# Altium PCB f429ig.pcbdoc (part 2 of 3)
Units mil, origin at the board's own origin, x right, y up, seen from the top; angles counter-clockwise.
Board outline 8198.65 x 7801.59 mil, 2 copper layers (Top Layer, Bottom Layer); 96 components, 183 nets, 663 pads, 462 vias.
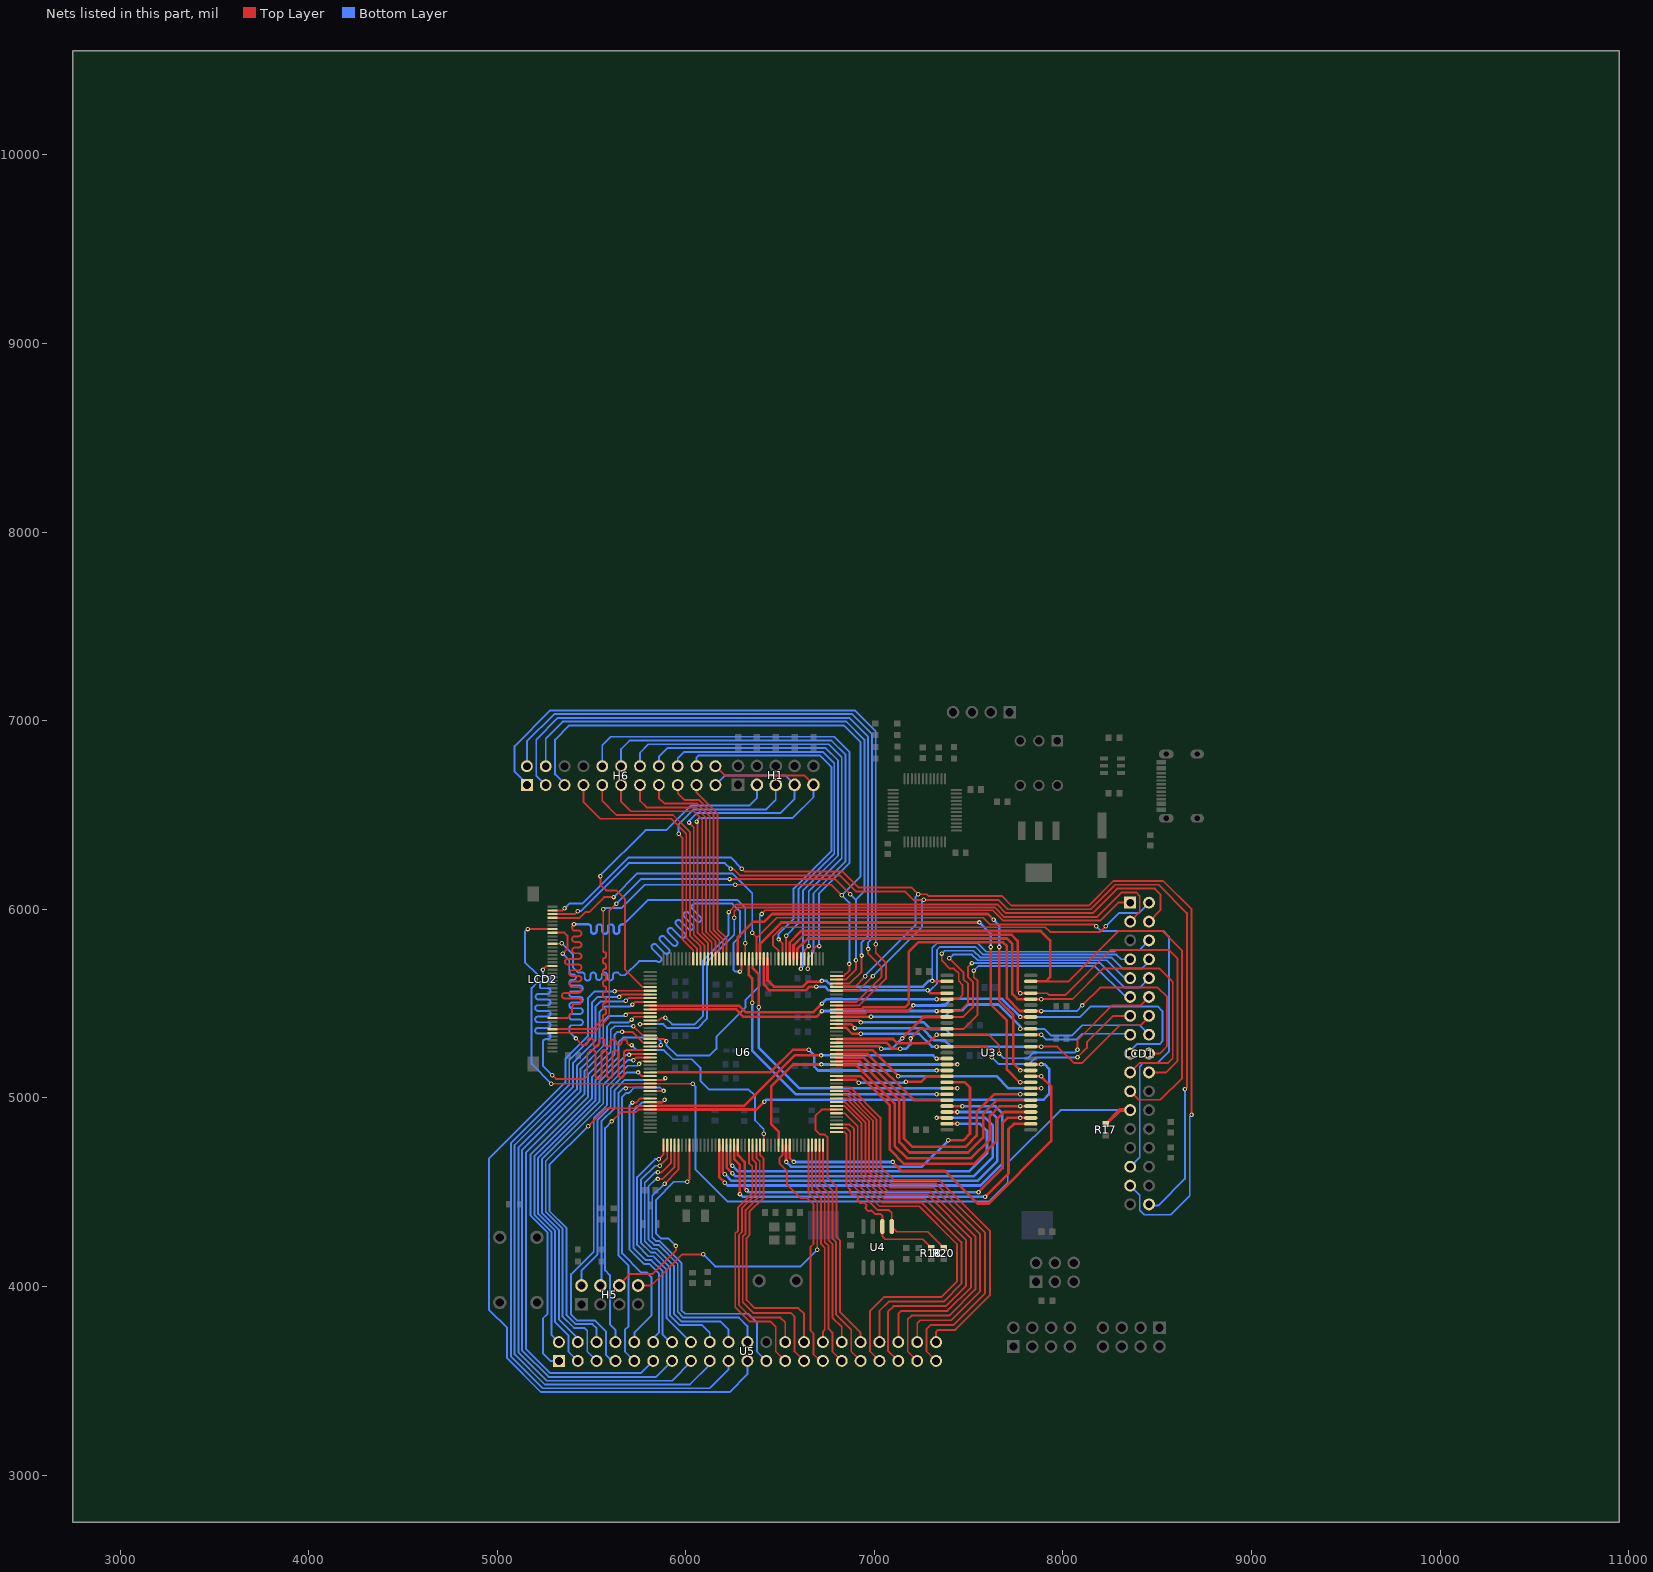
[diagram p2: the nets of this part, all layers, seen from the top]

## Via types
v1: diameter 24, hole 12, Top Layer to Bottom Layer, 383 vias
v2: diameter 40, hole 22, Top Layer to Bottom Layer, 75 vias
v3: diameter 40, hole 25, Top Layer to Bottom Layer, 1 vias
v4: diameter 28, hole 15, Top Layer to Bottom Layer, 1 vias
v5: diameter 30, hole 17, Top Layer to Bottom Layer, 1 vias
v6: diameter 46, hole 24, Top Layer to Bottom Layer, 1 vias

## Nets (pads, with @x,y where several pads share a name; then routed paths per layer and width w, separated by ;. In a path a pad name is that pad's centre, name@x,y a point inside that pad or via, vN(x,y) a via of type N, cw(c..) or ccw(c..) an arc to the next point about the centre after c; other vN are vias at no path point) (continued)
PA0: H5.8 U6.40 | length 1655
  Top Layer w10: H5.8@5746.93,4005 5816.93,4005 5981.93,4170 v1(6091.93,4170) ; U6.40@6649.46,4749.06 6649.46,4497.48 6696.93,4450 v1(6696.93,4195)
  Bottom Layer w10: v1(6091.93,4170) 6155.37,4106.56 6608.5,4106.56 v1(6696.93,4195)
PA1: U5.30 U6.41 | length 1076.3
  Top Layer w10: U6.41@6669.14,4749.06 6669.14,4512.8 6716.93,4465 6716.93,4225 6736.93,4205 6736.93,3770 6726.93,3760 U5.30@6726.93,3705
PA2: U5.31 U6.42 | length 1201.3
  Top Layer w10: U6.42@6688.83,4749.06 6688.83,4528.11 6736.93,4480 6736.93,4235 6756.93,4215 6756.93,3775 6776.93,3755 6776.93,3655 U5.31@6826.93,3605
PA3: U5.35 U6.47 | length 2071.6
  Top Layer w10: U6.47@6799.06,4859.29 6867.65,4859.29 6891.93,4835 6891.93,4560 7026.93,4425 7236.93,4425 7436.93,4225 7436.93,4025 7356.93,3945 7051.93,3945 6976.93,3870 6976.93,3655 U5.35@7026.93,3605
PA4: U5.36 U6.50 | length 1986.9
  Top Layer w10: U6.50@6799.06,4918.35 6843.59,4918.35 6911.93,4850 6911.93,4575 7041.93,4445 7251.93,4445 7461.68,4235.25 7461.68,4014.75 7366.93,3920 7076.93,3920 7026.93,3870 U5.36@7026.93,3705
PA5: U5.34 U6.51 | length 1439.9
  Top Layer w10: U6.51@6799.06,4938.03 6719.96,4938.03 6686.93,4905 6686.93,4830 6711.93,4805 6737.05,4805 6751.93,4790.11 6751.93,4575 6799.06,4527.88 6799.06,4262.88 6816.93,4245 6816.93,3865 6926.93,3755 U5.34@6926.93,3705
PA6: U5.37 U6.52 | length 2142.5
  Top Layer w10: U6.52@6799.06,4957.72 6839.22,4957.72 6931.93,4865 6931.93,4585 7051.93,4465 7266.93,4465 7486.43,4245.5 7486.43,4004.5 7377.18,3895.25 7102.18,3895.25 7071.93,3865 7071.93,3660 U5.37@7126.93,3605
PA7: U5.38 U6.53 | length 2025.6
  Top Layer w10: U6.53@6799.06,4977.4 6844.54,4977.4 6951.93,4870 6951.93,4595 7061.93,4485 7281.93,4485 7511.18,4255.75 7511.18,3994.25 7387.44,3870.5 7142.44,3870.5 7126.93,3855 U5.38@7126.93,3705
PA8: H6.11 U6.119 | length 1317.1
  Top Layer w10: H6.11@5656.93,6659 5656.93,6570 5706.93,6520 6041.93,6520 6086.93,6475 6086.93,5875 6137.65,5824.29 U6.119@6137.65,5737.24
PA9: H1.9 H6.22 U6.120 | length 2055.8
  Top Layer w10: v1(6056.93,6465) 6061.93,6460 6061.93,5875 6117.96,5818.98 U6.120@6117.96,5737.24 ; H6.22@6156.93,6759 6205.93,6710 6626.93,6710 H1.9@6676.93,6660
  Bottom Layer w10: v1(6056.93,6465) 6056.93,6470 6071.93,6485 6566.93,6485 6676.93,6595 H1.9@6676.93,6660
PA10: H1.7 H6.21 U6.121 | length 1910.9
  Top Layer w10: v1(6016.93,6460) 6041.93,6435 6041.93,5865 6098.28,5808.66 U6.121@6098.28,5737.24
  Bottom Layer w10: v1(6016.93,6460) 6016.93,6470 6056.93,6510 6501.93,6510 6576.93,6585 H1.7@6576.93,6660 6526.93,6710 6207.93,6710 H6.21@6156.93,6659
PA11: H6.9 U6.122 | length 1313.6
  Top Layer w10: H6.9@5556.93,6659 5556.93,6575 5631.93,6500 5931.93,6500 6021.93,6410 6021.93,5860 6078.59,5803.35 U6.122@6078.59,5737.24
PA12: H6.7 U6.123 | length 1390.8
  Top Layer w10: H6.7@5456.93,6659 5456.93,6570 5546.93,6480 5921.93,6480 6001.93,6400 6001.93,5850 6058.91,5793.03 U6.123@6058.91,5737.24
PA13: H1.5 U6.124 | length 1393.6
  Top Layer w10: v1(5961.93,6400) 5981.93,6380 5981.93,5840 6039.22,5782.72 U6.124@6039.22,5737.24
  Bottom Layer w10: v1(5961.93,6400) 5961.93,6450 6041.93,6530 6426.93,6530 6476.93,6580 H1.5@6476.93,6660
PA14: H1.3 U6.137 | length 1827.4
  Top Layer w10: v1(5546.93,6175) 5546.93,6130 5576.93,6100 5631.93,6100 5676.93,6055 5676.93,5681.15 5770.44,5587.64 U6.137@5810.88,5587.64
  Bottom Layer w10: v1(5546.93,6175) 5546.93,6180 5786.93,6420 5896.93,6420 6026.93,6550 6336.93,6550 6376.93,6590 H1.3@6376.93,6660
PA15: U5.21 U6.138 | length 3970.4
  Top Layer w10: v1(5621.93,5565) 5624.88,5567.95 U6.138@5810.88,5567.95
  Bottom Layer w10: v1(5621.93,5565) 5516.93,5565 5481.93,5530 5481.93,5330 5361.93,5210 5361.93,5085 4956.93,4680 4956.93,3875 5051.93,3780 5051.93,3620 5231.93,3440 6231.93,3440 6326.93,3535 U5.21@6326.93,3605
PB0: U5.41 U6.56 | length 2152.1
  Top Layer w10: U6.56@6799.06,5036.46 6860.48,5036.46 7011.93,4885 7011.93,4625 7091.93,4545 7326.93,4545 7586.93,4285 7586.93,3962.87 7418.81,3794.75 7296.68,3794.75 7276.93,3775 7276.93,3655 U5.41@7326.93,3605
PB1: U5.42 U6.57 | length 2042.5
  Top Layer w10: U6.57@6799.06,5056.14 6870.8,5056.14 7031.93,4895 7031.93,4635 7101.93,4565 7341.93,4565 7611.93,4295 7611.93,3952.51 7429.17,3769.75 7336.93,3769.75 7326.93,3759.75 U5.42@7326.93,3705
PB3: H5.2 U6.161 | length 1361.6
  Top Layer w10: v1(5746.93,5135) 5766.74,5115.2 U6.161@5810.88,5115.2
  Bottom Layer w10: H5.2@5446.93,4005 5446.93,4085 5531.93,4170 5531.93,4883.58 5601.93,4953.58 5601.93,5050 5686.93,5135 v1(5746.93,5135)
PB4: H5.4 U6.162 | length 1448
  Top Layer w10: U6.162@5810.88,5095.51 5882.44,5095.51 v1(5891.93,5105)
  Bottom Layer w10: H5.4@5546.93,4005 5551.93,4010 5551.93,4875.29 5621.93,4945.29 5621.93,5040 5676.93,5095 5881.93,5095 v1(5891.93,5105)
PB5: LCD1.23 LCD2.34 R17.1 U6.163 | length 5049.6
  Top Layer w10: v1(5161.93,5895) 5292.36,5895 LCD2.34@5293.11,5895.75 ; v1(5286.93,5075) 5810.05,5075 U6.163@5810.88,5075.83 5811.7,5075 v1(6036.93,5075)
  Top Layer w20: R17.1@8226.93,4860.32 8301.62,4935 LCD1.23@8356.16,4935
  Bottom Layer w10: v1(5161.93,5895) 5146.93,5880 5146.93,5720 5211.93,5655 5211.93,5611.75 5181.93,5581.75 5181.93,5180 v1(5286.93,5075) ; v1(6036.93,5075) 6051.93,5060 6051.93,4620 6221.93,4450 7606.93,4450 7706.93,4550 7706.93,4655 7986.93,4935 LCD1.23@8356.16,4935
PB6: U5.9 U6.164 | length 1653.6
  Top Layer w10: v1(5681.93,5050) 5688.07,5056.14 U6.164@5810.88,5056.14
  Bottom Layer w10: v1(5681.93,5050) 5666.93,5050 5641.93,5025 5641.93,4165 5696.93,4110 5696.93,3790 5676.93,3770 5676.93,3655 U5.9@5726.93,3605
PB7: U5.10 U6.165 | length 1738.5
  Top Layer w10: U6.165@5810.88,5036.46 5811.08,5036.66 v1(5881.93,5036.66)
  Bottom Layer w10: U5.10@5726.93,3705 5726.93,3755 5816.93,3845 5816.93,4050 5791.93,4075 5761.93,4075 5661.93,4175 5661.93,5005 5681.93,5025 5696.08,5025 5726.08,5055 5863.59,5055 v1(5881.93,5036.66)
PB8: U5.12 U6.167 | length 1473.5
  Top Layer w10: v1(5716.93,4975) 5736.93,4975 5759.02,4997.09 U6.167@5810.88,4997.09
  Bottom Layer w10: v1(5716.93,4975) 5701.93,4960 5701.93,4195 5776.93,4120 5806.93,4120 5856.93,4070 5856.93,3755 5826.93,3725 U5.12@5826.93,3705
PB9: U5.14 U6.168 | length 1604.5
  Top Layer w10: U6.168@5810.88,4977.4 5874.33,4977.4 v1(5886.93,4990)
  Bottom Layer w10: v1(5886.93,4990) 5871.93,4975 5766.93,4975 5721.93,4930 5721.93,4205 5786.93,4140 5816.93,4140 5876.93,4080 5876.93,3745 5916.93,3705 U5.14@5926.93,3705
PB10: H6.1 U6.79 | length 3928.2
  Top Layer w10: U6.79@6799.06,5489.21 6916.14,5489.21 7061.93,5635 7061.93,5715 7006.93,5770 v1(7006.93,5815)
  Bottom Layer w10: H6.1@5156.93,6659 5156.93,6665 5091.93,6730 5091.93,6865 5281.93,7055 6896.93,7055 7006.93,6945 v1(7006.93,5815)
PB11: H6.2 U6.80 | length 3684
  Top Layer w10: U6.80@6799.06,5508.9 6905.83,5508.9 7036.93,5640 7036.93,5695 6966.93,5765 v1(6966.93,5790)
  Bottom Layer w10: H6.2@5156.93,6759 5156.93,6890 5301.93,7035 6881.93,7035 6986.93,6930 6986.93,5845 6966.93,5825 v1(6966.93,5790)
PB12: H6.10 U6.92 | length 2661.3
  Top Layer w10: U6.92@6669.14,5737.24 6669.14,5782.2 6691.93,5805 v1(6706.93,5805)
  Bottom Layer w10: H6.10@5556.93,6759 5556.93,6870 5601.93,6915 6786.93,6915 6866.93,6835 6866.93,6245 6706.93,6085 v1(6706.93,5805)
PB13: H6.12 U6.93 | length 2601.8
  Top Layer w10: v1(6646.93,5685) 6649.46,5687.52 U6.93@6649.46,5737.24
  Bottom Layer w10: H6.12@5656.93,6759 5656.93,6850 5701.93,6895 6771.93,6895 6846.93,6820 6846.93,6255 6676.93,6085 6676.93,5770 6646.93,5740 v1(6646.93,5685)
PB14: H6.14 U6.94 | length 2338.1
  Top Layer w10: U6.94@6629.77,5737.24 6629.77,5782.83 v1(6651.93,5805)
  Bottom Layer w10: H6.14@5756.93,6759 5756.93,6830 5801.93,6875 6756.93,6875 6826.93,6805 6826.93,6270 6651.93,6095 v1(6651.93,5805)
PB15: H6.16 U6.95 | length 2285.3
  Top Layer w10: v1(6610.09,5685) U6.95@6610.09,5737.24
  Bottom Layer w10: H6.16@5856.93,6759 5856.93,6810 5901.93,6855 6741.93,6855 6806.93,6790 6806.93,6285 6621.93,6100 6621.93,5696.85 v1(6610.09,5685)
PC0: U3.16 U6.32 | length 1419.7
  Top Layer w13.8: U6.32@6491.93,4749.1 6491.93,4821.08 6451.93,4861.08 6451.93,5060 6568.94,5177.01 v1(6718.94,5177.01) ; U3.16@7384.8,5177.01 v1(7440.24,5177.01)
  Bottom Layer w13.8: v1(6718.94,5177.01) v1(7440.24,5177.01)
PC1: U5.29 U6.33 | length 1287.1
  Top Layer w10: U6.33@6511.66,4749.06 6511.66,4696.66 6496.93,4681.93 6496.93,4651.3 6536.93,4611.3 6536.93,4540 6606.93,4470 6641.93,4470 6676.93,4435 6676.93,4225 6661.93,4210 6661.93,3765 6676.93,3750 6676.93,3640 6711.93,3605 U5.29@6726.93,3605
PC2: U3.19 U6.34 | length 1525.7
  Top Layer w13.8: U6.34@6531.35,4749.06 6531.35,4668.8 6531.93,4668.21 v1(6531.93,4660) ; U3.19@7384.8,5082.52 7479.41,5082.52 7506.93,5055 7506.93,4810 7471.93,4775 v1(7391.93,4775)
  Bottom Layer w13.8: v1(6531.93,4660) 6556.93,4635 7251.93,4635 v1(7391.93,4775)
PC3: U3.37 U6.35 | length 2111.7
  Top Layer w13.8: U6.35@6551.03,4749.06 6551.03,4680.91 v1(6571.93,4660) ; v1(7096.93,4660) 7144.74,4612.19 7374.74,4612.19 7546.93,4440 7606.93,4440 7936.93,4770 7936.93,5061.58 v1(7884.5,5114.02) U3.37@7829.06,5114.02
  Bottom Layer w13.8: v1(6571.93,4660) v1(7096.93,4660)
PC4: U5.39 U6.54 | length 2145.4
  Top Layer w10: U6.54@6799.06,4997.09 6849.85,4997.09 6971.93,4875 6971.93,4605 7071.93,4505 7296.93,4505 7535.93,4266.01 7535.93,3983.99 7397.69,3845.75 7197.69,3845.75 7176.93,3825 7176.93,3655 U5.39@7226.93,3605
PC5: U5.40 U6.55 | length 2029.7
  Top Layer w10: U6.55@6799.06,5016.77 6855.17,5016.77 6991.93,4880 6991.93,4615 7081.93,4525 7311.93,4525 7560.68,4276.26 7560.68,3973.74 7407.94,3821.01 7242.94,3821.01 7226.93,3805 U5.40@7226.93,3705
PC6: H6.19 U6.115 | length 987.8
  Top Layer w10: H6.19@6056.93,6659 6056.93,6618.99 6166.93,6508.99 6166.93,5895 6216.39,5845.55 U6.115@6216.39,5737.24
PC7: H6.17 U6.116 | length 1065.4
  Top Layer w10: H6.17@5956.93,6659 5956.93,6615 5991.93,6580 6067.64,6580 6146.93,6500.71 6146.93,5890 6196.7,5840.24 U6.116@6196.7,5737.24
PC8: H6.15 U6.117 | length 1155.4
  Top Layer w10: H6.15@5856.93,6659 5856.93,6590 5886.93,6560 6059.36,6560 6126.93,6492.43 6126.93,5885 6177.02,5834.92 U6.117@6177.02,5737.24
PC9: H6.13 U6.118 | length 1239.9
  Top Layer w10: H6.13@5756.93,6659 5756.93,6575 5791.93,6540 6051.93,6540 6106.93,6485 6106.93,5880.39 6157.33,5830 U6.118@6157.33,5737.24
PC10: U5.19 U6.139 | length 3691.8
  Top Layer w10: v1(5646.93,5535) 5660.2,5548.27 U6.139@5810.88,5548.27
  Bottom Layer w10: v1(5646.93,5535) 5531.93,5535 5501.93,5505 5501.93,5320 5381.93,5200 5381.93,5070 5071.93,4760 5071.93,3630 5241.93,3460 6126.93,3460 6226.93,3560 U5.19@6226.93,3605
PC11: U5.17 U6.140 | length 3494.9
  Top Layer w10: v1(5681.93,5515) 5695.51,5528.58 U6.140@5810.88,5528.58
  Bottom Layer w10: v1(5681.93,5515) 5676.93,5510 5546.93,5510 5521.93,5485 5521.93,5305 5401.93,5185 5401.93,5060 5091.93,4750 5091.93,3640 5251.93,3480 6021.93,3480 6126.93,3585 U5.17@6126.93,3605
PC12: U5.15 U6.141 | length 3297.9
  Top Layer w10: v1(5716.93,5495) 5730.83,5508.9 U6.141@5810.88,5508.9
  Bottom Layer w10: v1(5716.93,5495) 5706.93,5485 5571.93,5485 5541.93,5455 5541.93,5290 5421.93,5170 5421.93,5045 5111.93,4735 5111.93,3650 5261.93,3500 5926.93,3500 6026.93,3600 U5.15@6026.93,3605
PC13: H5.6 U6.8 | length 1120.1
  Top Layer w10: H5.6@5646.93,4005 5646.93,4010 5701.93,4065 5821.93,4065 5946.93,4190 v1(5946.93,4215) ; v1(6006.93,4555) 6019.54,4567.6 U6.8@6019.54,4749.06
  Bottom Layer w10: v1(5946.93,4215) 5906.93,4255 5866.93,4255 5841.93,4280 5841.93,4460 5936.93,4555 v1(6006.93,4555)
PD0: LCD1.8 U3.5 U6.142 | length 3156.6
  Top Layer w10: v1(7356.93,5765) 7356.93,5728.7 7400.63,5685 7421.93,5685 7446.93,5660 7446.93,5620 7466.93,5600 7466.93,5545 7445.39,5523.46 U3.5@7384.8,5523.46
  Top Layer w13.8: U6.142@5810.88,5489.21 6282.73,5489.21 6316.93,5455 6676.93,5455 v1(6721.93,5500) ; v1(7329.37,5523.46) U3.5@7384.8,5523.46
  Bottom Layer w10: v1(7356.93,5765) 7371.93,5780 7525.01,5780 7560.01,5745 8256.93,5745 8316.93,5685 8416.93,5685 8456.16,5724.23 LCD1.8@8456.16,5735
  Bottom Layer w13.8: v1(6721.93,5500) 6745.39,5523.46 v1@7328.58,5523.46
PD1: LCD1.9 U3.7 U6.143 | length 3029.2
  Top Layer w10: U3.7@7384.8,5460.47 7452.4,5460.47 7496.93,5505 7496.93,5605 7471.93,5630 7471.93,5665 v1(7396.93,5740)
  Top Layer w13.8: U6.143@5810.88,5469.53 6267.41,5469.53 6306.93,5430 6691.93,5430 v1(6721.93,5460) ; v1(7329.37,5460.47) U3.7@7384.8,5460.47
  Bottom Layer w10: v1(7396.93,5740) 7416.93,5760 7516.93,5760 7546.93,5730 8231.93,5730 8326.93,5635 LCD1.9@8356.16,5635
  Bottom Layer w13.8: v1(6721.93,5460) 6722.4,5460.47 v1(7329.37,5460.47)
PD2: U5.13 U6.144 | length 3078.8
  Top Layer w10: v1(5681.93,5440) 5691.77,5449.84 U6.144@5810.88,5449.84
  Bottom Layer w10: v1(5681.93,5440) 5676.93,5435 5591.93,5435 5561.93,5405 5561.93,5275 5441.93,5155 5441.93,5035 5131.93,4725 5131.93,3660 5271.93,3520 5841.93,3520 U5.13@5926.93,3605
PD3: U5.11 U6.145 | length 2893.6
  Top Layer w10: v1(5711.93,5415) 5726.93,5430 5810.72,5430 U6.145@5810.88,5430.16
  Bottom Layer w10: v1(5711.93,5415) 5696.93,5400 5601.93,5400 5581.93,5380 5581.93,5260 5461.93,5140 5461.93,5020 5151.93,4710 5151.93,3670 5281.93,3540 5761.93,3540 U5.11@5826.93,3605
PD4: LCD1.4 U6.146 | length 3488.6
  Top Layer w10: U6.146@5810.88,5410.47 5857.4,5410.47 5871.93,5425 v1(5891.93,5425) ; v1(6226.93,5985) 6267.93,6026 7650.93,6026 7696.93,5980 8156.93,5980 8286.93,6110 8486.93,6110 8516.93,6080 8516.93,5995.77 LCD1.4@8456.16,5935
  Bottom Layer w10: v1(5891.93,5425) 5926.93,5390 6046.93,5390 6091.93,5435 6091.93,5730 6226.93,5865 v1(6226.93,5985)
PD5: LCD1.3 U6.147 | length 3465.2
  Top Layer w10: v1(5756.93,5390.79) U6.147@5810.88,5390.79 ; v1(6256.93,5955) 6256.93,5990 6276.93,6010 7636.93,6010 7686.93,5960 8181.93,5960 8311.64,6089.71 8387.22,6089.71 8406.93,6070 8406.93,5985.77 LCD1.3@8356.16,5935
  Bottom Layer w10: v1(5756.93,5390.79) 5881.15,5390.79 5901.93,5370 6061.93,5370 6111.93,5420 6111.93,5720 6256.93,5865 v1(6256.93,5955)
PD6: U5.1 U6.150 | length 2277.5
  Top Layer w10: v1(5721.93,5380) 5770.21,5331.73 U6.150@5810.88,5331.73
  Bottom Layer w10: U5.1@5326.93,3605 5281.93,3605 5241.93,3645 5241.93,3830 5266.93,3855 5266.93,4285 5176.93,4375 5176.93,4700 5481.93,5005 5481.93,5125 5601.93,5245 5601.93,5360 5621.93,5380 v1(5721.93,5380)
PD7: LCD1.1 U6.151 | length 3252.4
  Top Layer w10: U6.151@5810.88,5312.05 5884.89,5312.05 v1(5896.93,5300) ; v1(6401.93,5975) 6421.93,5995 7626.93,5995 7681.93,5940 8196.93,5940 8291.93,6035 LCD1.1@8356.16,6035
  Bottom Layer w10: v1(5896.93,5300) 5896.93,5280 5951.93,5225 6126.93,5225 6161.93,5260 6161.93,5325 6316.93,5480 6316.93,5520 6391.93,5595 6391.93,5965 v1(6401.93,5975)
PD8: LCD1.19 U3.50 U6.96 | length 3112.3
  Top Layer w10: v1(7884.5,5523.46) 8050.39,5523.46 8211.93,5685 8511.93,5685 8581.93,5615 8581.93,5210 8556.93,5185 8406.16,5185 LCD1.19@8356.16,5135
  Top Layer w13.8: U6.96@6590.4,5737.24 6590.4,5788.46 6646.93,5845 7701.93,5845 7731.93,5815 7731.93,5550 7758.47,5523.46 U3.50@7829.06,5523.46 v1(7884.5,5523.46)
PD9: LCD1.20 U3.51 U6.97 | length 3256.6
  Top Layer w10: U3.51@7829.06,5554.96 7916.97,5554.96 7926.97,5544.96 8011.89,5544.96 8251.93,5785 8561.93,5785 8606.93,5740 8606.93,5195 8546.93,5135 LCD1.20@8456.16,5135
  Top Layer w13.8: U6.97@6570.72,5737.24 6570.72,5808.78 6626.93,5865 7726.93,5865 7759.83,5832.1 7759.83,5568.76 v1(7773.63,5554.96) U3.51@7829.06,5554.96
PD10: LCD1.21 U3.53 U6.98 | length 3713.9
  Top Layer w10: 7909.88,5617.95 8029.88,5617.95 8296.93,5885 8526.93,5885 8631.93,5780 8631.93,5105 8516.93,4990 8401.16,4990 LCD1.21@8356.16,5035
  Top Layer w13.8: U6.98@6551.03,5737.24 6551.03,5824.09 6611.93,5885 7881.93,5885 7931.93,5835 7931.93,5640 7909.88,5617.95 U3.53@7829.06,5617.95
PD11: H6.18 U6.99 | length 2054
  Top Layer w10: U6.99@6531.35,5737.24 6531.35,5859.41 v1(6531.93,5860)
  Bottom Layer w10: H6.18@5956.93,6759 5956.93,6800 5991.93,6835 6726.93,6835 6786.93,6775 6786.93,6295 6596.93,6105 6596.93,5925 v1(6531.93,5860)
PD12: H6.20 U6.100 | length 1933
  Top Layer w10: v1(6491.93,5840) 6511.93,5820 6511.93,5737.51 U6.100@6511.66,5737.24
  Bottom Layer w10: H6.20@6056.93,6759 6056.93,6805 6066.93,6815 6711.93,6815 6772.93,6754 6772.93,6311 6571.93,6110 6571.93,5950 6491.93,5870 v1(6491.93,5840)
PD13: LCD1.2 U6.101 | length 2219.7
  Top Layer w10: U6.101@6491.98,5737.24 6491.98,5779.96 6461.93,5810 6461.93,5855 6511.93,5905 7906.93,5905 7931.93,5880 8196.93,5880 v1(8226.93,5910)
  Bottom Layer w10: v1(8226.93,5910) 8296.93,5980 8401.16,5980 LCD1.2@8456.16,6035
PD14: LCD1.6 U3.2 U6.104 | length 2495.4
  Top Layer w13.8: U6.104@6432.92,5737.24 6432.92,5624.02 6466.93,5590 6620.37,5590 6645.27,5614.9 6716.83,5614.9 v1(6721.93,5620) ; v1(7306.93,5620) 7308.98,5617.95 U3.2@7384.8,5617.95
  Bottom Layer w10: v1(7306.93,5620) 7306.93,5795 7331.93,5820 7546.93,5820 7591.93,5775 8271.93,5775 8281.93,5785 8406.16,5785 LCD1.6@8456.16,5835
  Bottom Layer w13.8: v1(6721.93,5620) 6746.93,5620 6776.93,5590 7258.03,5590 7288.03,5620 v1(7306.93,5620)
PD15: LCD1.7 U3.4 U6.105 | length 2445.3
  Top Layer w13.8: U6.105@6413.24,5737.24 6413.24,5601.02 6444.26,5570 6636.93,5570 6656.93,5590 v1(6691.93,5590) ; v1(7281.93,5570) 7296.97,5554.96 U3.4@7384.8,5554.96
  Bottom Layer w10: v1(7281.93,5570) 7296.93,5570 7331.93,5605 7331.93,5785 7346.93,5800 7536.93,5800 7576.93,5760 8283.51,5760 8308.51,5735 LCD1.7@8356.16,5735
  Bottom Layer w13.8: v1(6691.93,5590) 6736.93,5590 6756.93,5570 v1(7281.93,5570)
PE0: U3.15 U5.6 U6.169 | length 3448.9
  Top Layer w10: v1(5481.93,4850) 5576.93,4945 5726.93,4945 5739.65,4957.72 U6.169@5810.88,4957.72
  Top Layer w13.8: U6.169@5810.88,4957.72 6309.65,4957.72 6576.93,5225 v1(6716.93,5225) ; v1(7329.37,5208.5) U3.15@7384.8,5208.5
  Bottom Layer w10: v1(5481.93,4850) 5276.93,4645 5276.93,4400 5366.93,4310 5366.93,3850 5416.93,3800 5504.9,3800 5526.93,3777.96 U5.6@5526.93,3705
  Bottom Layer w13.8: v1(6716.93,5225) 7311.75,5225 v1@7328.25,5208.5
PE1: U3.39 U5.8 U6.170 | length 3828.8
  Top Layer w10: v1(5606.93,4875) 5656.93,4925 5736.93,4925 5749.96,4938.03 U6.170@5810.88,4938.03
  Top Layer w13.8: U6.170@5810.88,4938.03 6374.96,4938.03 v1(6416.93,4980) ; U3.39@7829.06,5177.01 v1(7884.5,5177.01)
  Bottom Layer w10: v1(5606.93,4875) 5571.93,4840 5571.93,4085 5596.93,4060 5596.93,3800 5626.93,3770 U5.8@5626.93,3705
  Bottom Layer w13.8: v1(6416.93,4980) 6426.93,4990 7896.93,4990 7926.93,5020 7926.93,5154.09 7904.01,5177.01 v1(7884.5,5177.01)
PE2: U5.16 U6.1 | length 1246.4
  Top Layer w10: v1(5856.93,4675) 5881.74,4699.8 U6.1@5881.74,4749.06
  Bottom Layer w10: v1(5856.93,4675) 5836.93,4675 5741.93,4580 5741.93,4220 5801.93,4160 5826.93,4160 5896.93,4090 5896.93,3835 U5.16@6026.93,3705
PE3: U5.18 U6.2 | length 1351.1
  Top Layer w10: v1(5861.93,4640) 5901.43,4679.49 U6.2@5901.43,4749.06
  Bottom Layer w10: v1(5861.93,4640) 5836.93,4640 5761.93,4565 5761.93,4232.56 5814.49,4180 5836.93,4180 5916.93,4100 5916.93,3845 5966.93,3795 6086.93,3795 6126.93,3755 U5.18@6126.93,3705
PE4: U5.20 U6.3 | length 1440.8
  Top Layer w10: v1(5851.93,4605) 5871.93,4605 5921.11,4654.17 U6.3@5921.11,4749.06
  Bottom Layer w10: v1(5851.93,4605) 5836.93,4605 5781.93,4550 5781.93,4240 5821.93,4200 5846.08,4200 5936.93,4109.14 5936.93,3855 5976.93,3815 6181.93,3815 6226.93,3770 U5.20@6226.93,3705
PE5: U5.22 U6.4 | length 1526.6
  Top Layer w10: v1(5851.93,4570) 5877.28,4570 5940.8,4633.51 U6.4@5940.8,4749.06
  Bottom Layer w10: v1(5851.93,4570) 5841.93,4570 5801.93,4530 5801.93,4250 5831.93,4220 5855.92,4220 5956.93,4118.99 5956.93,3865 5986.93,3835 6281.93,3835 6326.93,3790 U5.22@6326.93,3705
PE6: U5.23 U6.5 | length 1660
  Top Layer w10: v1(5886.93,4545) 5960.48,4618.54 U6.5@5960.48,4749.06
  Bottom Layer w10: v1(5886.93,4545) 5821.93,4480 5821.93,4260 5841.93,4240 5861.93,4240 5976.93,4125 5976.93,3875 5996.93,3855 6331.93,3855 6376.93,3810 6376.93,3655 U5.23@6426.93,3605
PE7: LCD1.10 U3.8 U6.68 | length 2086.7
  Top Layer w10: U3.8@7384.8,5428.98 7470.91,5428.98 7521.93,5480 7521.93,5615 7496.93,5640 7496.93,5695 v1(7516.93,5715)
  Top Layer w13.8: U6.68@6799.06,5272.68 7024.26,5272.68 v1(7036.93,5260) ; v1(7146.93,5315) 7260.91,5428.98 U3.8@7384.8,5428.98
  Bottom Layer w10: v1(7516.93,5715) 8196.93,5715 8326.93,5585 8406.16,5585 LCD1.10@8456.16,5635
  Bottom Layer w13.8: v1(7036.93,5260) 7091.93,5260 v1(7146.93,5315)
PE8: LCD1.11 U3.10 U6.69 | length 2004.6
  Top Layer w10: U3.10@7384.8,5365.98 7472.91,5365.98 7546.93,5440 7546.93,5620 7526.93,5640 v1(7526.93,5675)
  Top Layer w13.8: U6.69@6799.06,5292.36 7064.58,5292.36 7096.93,5260 v1(7136.93,5260) ; v1(7191.93,5315) 7242.91,5365.98 U3.10@7384.8,5365.98
  Bottom Layer w10: v1(7526.93,5675) 7551.93,5700 8166.93,5700 8331.93,5535 LCD1.11@8356.16,5535
  Bottom Layer w13.8: v1(7136.93,5260) 7166.93,5260 7191.93,5285 v1(7191.93,5315)
PE9: LCD1.12 U3.11 U6.70 | length 1926.2
  Top Layer w10: U3.11@7384.8,5334.49 7607.44,5334.49 7661.93,5280 v1(7661.93,5235) ; v1(8076.93,5255) 8076.93,5305 8261.93,5490 8411.93,5490 8456.16,5534.23 LCD1.12@8456.16,5535
  Top Layer w13.8: U6.70@6799.06,5312.05 7098.96,5312.05 7121.01,5290 7284.09,5290 v1@7328.58,5334.49 ; v1(7329.37,5334.49) U3.11@7384.8,5334.49
  Bottom Layer w10: v1(7661.93,5235) 7686.93,5210 7811.93,5210 7841.93,5240 8061.93,5240 v1(8076.93,5255)
PE10: LCD1.13 U3.13 U6.73 | length 1775.9
  Top Layer w10: U3.13@7384.8,5271.5 7595.43,5271.5 7621.93,5245 v1(7621.93,5215) ; v1(8076.93,5215) 8126.93,5265 8126.93,5295 8266.93,5435 LCD1.13@8356.16,5435
  Top Layer w13.8: U6.73@6799.06,5371.1 6850.84,5371.1 6881.93,5340 v1(6926.93,5340) ; v1(7329.37,5271.5) U3.13@7384.8,5271.5
  Bottom Layer w10: v1(7621.93,5215) 7656.93,5180 7821.93,5180 7856.93,5215 v1(8076.93,5215)
  Bottom Layer w13.8: v1(6926.93,5340) 7236.93,5340 7305.43,5271.5 v1@7328.25,5271.5
PE11: LCD1.14 U3.42 U6.74 | length 1904.7
  Top Layer w10: v1(7884.5,5271.5) 7970.43,5271.5 8056.93,5185 8101.93,5185 8301.93,5385 8411.93,5385 8456.16,5429.23 LCD1.14@8456.16,5435
  Top Layer w13.8: U6.74@6799.06,5390.79 6876.15,5390.79 v1(6896.93,5370) ; U3.42@7829.06,5271.5 v1(7884.5,5271.5)
  Bottom Layer w13.8: v1(6896.93,5370) 7251.93,5370 7316.93,5305 7371.93,5305 7405.43,5271.5 v1(7884.5,5271.5)
PE12: LCD1.15 U3.44 U6.75 | length 1668.6
  Top Layer w13.8: U6.75@6799.06,5410.47 6916.47,5410.47 v1(6926.93,5400) ; U3.44@7829.06,5334.49 v1(7884.5,5334.49)
  Bottom Layer w10: v1(7884.5,5334.49) 7908.99,5310 8071.93,5310 8101.93,5340 8351.16,5340 LCD1.15@8356.16,5335
  Bottom Layer w13.8: v1(6926.93,5400) 7261.93,5400 7296.93,5365 7376.93,5365 7407.44,5334.49 v1(7884.5,5334.49)
PE13: LCD1.16 U3.45 U6.76 | length 1858.6
  Top Layer w13.8: U6.76@6799.06,5430.16 6981.78,5430.16 v1(6981.93,5430) ; v1(7773.63,5365.98) U3.45@7829.06,5365.98
  Bottom Layer w10: v1(7773.63,5365.98) 7900.95,5365.98 7936.93,5330 8046.93,5330 8101.93,5385 8406.16,5385 LCD1.16@8456.16,5335
  Bottom Layer w13.8: v1(6981.93,5430) 7371.93,5430 7406.93,5465 7466.93,5465 7496.93,5495 7656.93,5495 7773.63,5378.3 v1(7773.63,5365.98)
PE14: LCD1.17 U3.47 U6.77 | length 2253.8
  Top Layer w13.8: U6.77@6799.06,5449.84 6951.77,5449.84 6961.93,5460 7176.93,5460 v1(7206.93,5490) ; v1(7773.63,5428.98) U3.47@7829.06,5428.98
  Bottom Layer w10: v1(7773.63,5428.98) 8090.91,5428.98 8146.93,5485 8501.93,5485 8526.93,5460 8526.93,5300 8511.93,5285 8391.93,5285 8356.16,5249.23 LCD1.17@8356.16,5235
  Bottom Layer w13.8: v1(7206.93,5490) 7371.93,5490 7406.93,5525 7677.61,5525 v1(7773.63,5428.98)
PE15: LCD1.18 U3.48 U6.78 | length 2818.8
  Top Layer w10: v1(8101.93,5490) 8196.93,5585 8501.93,5585 8551.93,5535 8551.93,5275 8511.93,5235 LCD1.18@8456.16,5235
  Top Layer w13.8: U6.78@6799.06,5469.53 6931.58,5469.53 6942.05,5480 7161.93,5480 7182.5,5500.57 7182.5,5775.57 7231.83,5824.9 7682.03,5824.9 7701.93,5805 7701.93,5528.45 7769.92,5460.47 U3.48@7829.06,5460.47 v1(7884.5,5460.47)
  Bottom Layer w10: v1(7884.5,5460.47) 8072.4,5460.47 v1(8101.93,5490)
PF0: U3.23 U6.16 | length 2312.6
  Top Layer w13.8: U6.16@6177.02,4749.06 6177.02,4579.92 v1(6206.93,4550) ; U3.23@7384.8,4956.53 7386.33,4955 v1(7466.93,4955)
  Bottom Layer w13.8: v1(6206.93,4550) 6221.93,4535 7561.93,4535 7676.93,4650 7676.93,4920 7641.93,4955 v1(7466.93,4955)
PF1: U3.24 U6.17 | length 2167.9
  Top Layer w13.8: U6.17@6196.7,4749.06 6196.7,4605.24 v1(6206.93,4595) ; U3.24@7384.8,4925.04 v1(7440.24,4925.04)
  Bottom Layer w13.8: v1(6206.93,4595) 6241.93,4560 7546.93,4560 7651.93,4665 7651.93,4890 7616.89,4925.04 v1(7440.24,4925.04)
PF2: U3.25 U6.18 | length 2128.3
  Top Layer w13.8: U6.18@6216.39,4749.06 6216.39,4630.55 v1(6246.93,4600) ; v1(7329.37,4893.54) U3.25@7384.8,4893.54
  Bottom Layer w13.8: v1(6246.93,4600) 6261.93,4585 7526.93,4585 7626.93,4685 7626.93,4855 7588.39,4893.54 v1(7329.37,4893.54)
PF3: U3.26 U6.19 | length 1862.8
  Top Layer w13.8: U6.19@6236.07,4749.06 6236.07,4650.87 v1(6246.93,4640) ; U3.26@7384.8,4862.05 v1(7440.24,4862.05)
  Bottom Layer w13.8: v1(6246.93,4640) 6276.93,4610 7501.93,4610 7596.93,4705 7596.93,4825 7559.88,4862.05 v1(7440.24,4862.05)
PF4: U3.29 U6.20 | length 2118.3
  Top Layer w13.8: U6.20@6255.76,4749.06 6255.76,4676.18 6286.93,4645 v1(6286.93,4490) ; v1(7586.93,4475) 7711.14,4599.21 7711.14,4834.21 7738.98,4862.05 U3.29@7829.06,4862.05
  Bottom Layer w13.8: v1(6286.93,4490) 6301.93,4475 v1(7586.93,4475)
PF5: U3.30 U6.21 | length 2073.2
  Top Layer w13.8: U6.21@6275.44,4749.06 6275.44,4696.5 6311.93,4660 6311.93,4520 v1(6321.93,4510) ; v1(7551.93,4500) 7679.39,4627.46 7679.39,4867.46 7705.47,4893.54 v1(7773.63,4893.54) U3.30@7829.06,4893.54
  Bottom Layer w13.8: v1(6321.93,4510) 6331.93,4500 v1(7551.93,4500)
PF6: U5.25 U6.24 | length 1362.8
  Top Layer w10: U6.24@6334.5,4749.06 6334.5,4654.33 6351.93,4636.89 6351.93,4495 6276.93,4420 6276.93,4296.57 6261.93,4281.57 6261.93,3890 6336.93,3815 6446.93,3815 6476.93,3785 6476.93,3655 U5.25@6526.93,3605
PF7: U5.26 U6.25 | length 1281
  Top Layer w10: U6.25@6354.18,4749.06 6354.18,4672.76 6371.93,4655 6371.93,4490 6296.93,4415 6296.93,4288.28 6281.93,4273.28 6281.93,3900 6346.93,3835 6501.93,3835 6526.93,3810 U5.26@6526.93,3705
PF8: U5.27 U6.26 | length 1440.6
  Top Layer w10: U6.26@6373.87,4749.06 6373.87,4683.07 6391.93,4665 6391.93,4480 6316.93,4405 6316.93,4280 6301.93,4265 6301.93,3915 6356.93,3860 6556.93,3860 6576.93,3840 6576.93,3655 U5.27@6626.93,3605
PF9: U5.28 U6.27 | length 1351.1
  Top Layer w10: U6.27@6393.55,4749.06 6393.55,4696.8 6411.93,4678.41 6411.93,4470 6336.93,4395 6336.93,4271.72 6321.93,4256.72 6321.93,3928.14 6365.07,3885 6596.93,3885 6626.93,3855 U5.28@6626.93,3705
PF10: LCD2.33 U6.28 | length 2785.8
  Top Layer w10: LCD2.33@5293.11,5876.06 5355.87,5876.06 5371.93,5860 5371.93,5790 v1(5346.93,5765) ; v1(5416.93,5315) 5451.93,5280 5464.6,5280 ccw(c5464.6,5295) 5479.6,5295 5479.6,5302.37 cw(c5494.6,5302.37) 5509.6,5302.37 5509.6,5286.5 ccw(c5524.6,5286.5) 5539.6,5286.5 5539.6,5301.72 cw(c5554.6,5301.72) 5569.6,5301.72 5569.6,5286.02 ccw(c5584.6,5286.02) 5599.6,5286.02 5599.6,5295 cw(c5614.6,5295) 5629.6,5295 ccw(c5644.6,5295) 5659.6,5295 cw(c5674.6,5295) 5689.6,5295 ccw(c5704.6,5295) 5704.6,5280 v1(5711.93,5280) ; U6.28@6413.24,4749.06 v1(6413.24,4810)
  Bottom Layer w10: v1(5346.93,5765) 5381.93,5730 5381.93,5670.26 ccw(c5396.93,5670.26) 5396.93,5655.26 5401.86,5655.26 cw(c5401.86,5640.26) 5401.86,5625.26 5396.93,5625.26 ccw(c5396.93,5610.26) 5396.93,5595.26 5439.1,5595.26 cw(c5439.1,5580.26) 5439.1,5565.26 5396.93,5565.26 ccw(c5396.93,5550.26) 5396.93,5535.26 5439.1,5535.26 cw(c5439.1,5520.26) 5439.1,5505.26 5396.93,5505.26 ccw(c5396.93,5490.26) 5396.93,5475.26 5439.1,5475.26 cw(c5439.1,5460.26) 5439.1,5445.26 5396.93,5445.26 ccw(c5396.93,5430.26) 5396.93,5415.26 5439.1,5415.26 cw(c5439.1,5400.26) 5439.1,5385.26 5396.93,5385.26 ccw(c5396.93,5370.26) 5381.93,5370.26 5381.93,5350 v1(5416.93,5315) ; v1(5711.93,5280) 5739.12,5252.81 5884.12,5252.81 5931.93,5205 6031.93,5205 6076.93,5160 6076.93,5090 6121.93,5045 6331.93,5045 6366.93,5010 6366.93,4880 6413.24,4833.7 v1(6413.24,4810)
PF11: U3.18 U6.59 | length 606.3
  Top Layer w13.8: U6.59@6799.06,5095.51 6901.43,5095.51 v1(6916.93,5080) ; v1(7166.93,5085) 7246.93,5085 7275.95,5114.02 U3.18@7384.8,5114.02
  Bottom Layer w13.8: v1(6916.93,5080) 7161.93,5080 v1(7166.93,5085)
PF12: U3.31 U6.60 | length 1541.6
  Top Layer w13.8: U6.60@6799.06,5115.2 6799.25,5115 6926.93,5115 7081.93,4960 7081.93,4725 7156.93,4650 7526.93,4650 7646.93,4770 7646.93,4885 7686.97,4925.04 U3.31@7829.06,4925.04
PF13: U3.32 U6.63 | length 1554.3
  Top Layer w13.8: U6.63@6799.06,5174.25 6902.69,5174.25 7106.93,4970 7106.93,4745 7171.93,4680 7511.93,4680 7611.93,4780 7611.93,4905 7663.46,4956.53 v1(7773.63,4956.53) U3.32@7829.06,4956.53
PF14: U3.33 U6.64 | length 1547.7
  Top Layer w13.8: U6.64@6799.06,5193.94 6923,5193.94 7131.93,4985 7131.93,4765 7186.93,4710 7496.93,4710 7576.93,4790 7576.93,4915 7649.96,4988.03 U3.33@7829.06,4988.03
PF15: U3.34 U6.65 | length 1541.1
  Top Layer w13.8: U6.65@6799.06,5213.62 6943.32,5213.62 7156.93,5000 7156.93,4785 7201.93,4740 7481.93,4740 7541.93,4800 7541.93,4925 7636.46,5019.53 v1(7773.63,5019.53) U3.34@7829.06,5019.53
PG0: U3.22 U6.66 | length 687.3
  Top Layer w13.8: U6.66@6799.06,5233.31 6963.63,5233.31 7208.9,4988.03 U3.22@7384.8,4988.03
PG1: U3.35 U6.67 | length 1225.4
  Top Layer w13.8: U6.67@6799.06,5252.99 6988.95,5252.99 v1(7126.93,5115) ; U3.35@7829.06,5051.02 v1(7884.5,5051.02)
  Bottom Layer w13.8: v1(7126.93,5115) 7646.93,5115 7711.93,5050 7883.48,5050 v1(7884.5,5051.02)
PG2: U3.36 U6.106 | length 2287.4
  Top Layer w13.8: U6.106@6393.55,5737.24 6393.55,5816.61 6506.93,5930 v1(7556.93,5930) ; v1(7616.93,5800) 7616.93,5495 7701.93,5410 7701.93,5149.22 v1@7773.63,5077.52 ; v1(7773.63,5082.52) U3.36@7829.06,5082.52
  Bottom Layer w13.8: v1(7556.93,5930) 7616.93,5870 v1(7616.93,5800)
PG3: LCD1.29 LCD2.37 U6.107 | length 5180.7
  Top Layer w10: LCD2.37@5293.11,5954.8 5436.73,5954.8 5466.93,5985 5486.93,5985 5566.93,6065 v1(5616.93,6065) ; v1(6351.93,5875) 6373.87,5853.07 6373.87,5846.93 ; U6.107@6373.87,5737.24 6373.87,5846.93 ; v1(8176.93,5910) 8166.93,5920 7611.93,5920 7576.93,5955 6481.93,5955 6373.87,5846.93
  Bottom Layer w10: v1(5616.93,6065) 5741.93,6190 6246.93,6190 6351.93,6085 v1(6351.93,5875) ; v1(8176.93,5910) 8176.93,5909.12 8201.05,5885 8531.93,5885 8561.93,5855 8561.93,5244.71 8502.22,5185 8426.93,5185 8406.93,5165 8406.93,4685.77 LCD1.29@8356.16,4635
PG4: U3.20 U6.108 | length 1684
  Top Layer w13.8: U6.108@6354.18,5737.24 6354.18,5687.76 6386.93,5655 v1(6386.93,5480) ; U3.20@7384.8,5051.02 v1(7440.24,5051.02)
  Bottom Layer w13.8: v1(6386.93,5480) 6386.93,5265 6601.93,5050 7439.22,5050 v1(7440.24,5051.02)
PG5: U3.21 U6.109 | length 1622
  Top Layer w13.8: U6.109@6334.5,5737.24 6334.5,5650.57 6351.93,5633.13 v1(6351.93,5505) ; v1(7329.37,5019.53) U3.21@7384.8,5019.53
  Bottom Layer w13.8: v1(6351.93,5505) 6351.93,5250 6581.93,5020 6696.93,5020 6697.4,5019.53 v1@7328.58,5019.53
PG6: LCD2.10 U6.110 | length 2812.8
  Top Layer w10: LCD2.10@5293.11,5423.31 5370.24,5423.31 5396.93,5450 5396.93,5481.7 cw(c5411.93,5481.7) 5411.93,5496.7 5431.4,5496.7 ccw(c5431.4,5511.7) 5431.4,5526.7 5358.12,5526.7 cw(c5358.12,5541.7) 5358.12,5556.7 5431.4,5556.7 ccw(c5431.4,5571.7) 5431.4,5586.7 5398.78,5586.7 cw(c5398.78,5601.7) 5398.78,5616.7 5431.4,5616.7 ccw(c5431.4,5631.7) 5431.4,5646.7 5396.19,5646.7 cw(c5396.19,5661.7) 5396.19,5676.7 5431.4,5676.7 ccw(c5431.4,5691.7) 5431.4,5706.7 5373.89,5706.7 cw(c5373.89,5721.7) 5373.89,5736.7 5431.4,5736.7 ccw(c5431.4,5751.7) 5431.4,5766.7 5411.93,5766.7 cw(c5411.93,5781.7) 5411.93,5796.7 5431.4,5796.7 ccw(c5431.4,5811.7) 5431.4,5826.7 5411.93,5826.7 cw(c5411.93,5841.7) 5411.93,5856.7 5431.4,5856.7 ccw(c5431.4,5871.7) 5431.4,5886.7 5411.93,5886.7 cw(c5411.93,5901.7) 5396.93,5901.7 5396.93,5910 v1(5406.93,5920) ; U6.110@6314.81,5737.24 v1(6314.81,5820)
  Bottom Layer w10: 5671.93,5920 5801.93,6050 6271.93,6050 6314.81,6007.13 v1(6314.81,5820)
  Bottom Layer w12: v1(5406.93,5920) 5482.04,5920 cw(c5482.04,5905) 5497.04,5905 5497.04,5885.35 ccw(c5512.04,5885.35) 5527.04,5885.35 5527.04,5905 cw(c5542.04,5905) 5557.04,5905 5557.04,5885.35 ccw(c5572.04,5885.35) 5587.04,5885.35 5587.04,5905 cw(c5602.04,5905) 5617.04,5905 5617.04,5885.35 ccw(c5632.04,5885.35) 5647.04,5885.35 5647.04,5905 cw(c5662.04,5905) 5662.04,5920 5671.93,5920
PG7: LCD2.30 U6.111 | length 2805.2
  Top Layer w10: LCD2.30@5293.11,5817.01 5338.94,5817.01 v1(5341.93,5820) ; v1(6286.93,5670) 6295.13,5678.19 U6.111@6295.13,5737.24
  Bottom Layer w10: v1(5341.93,5820) 5401.93,5760 5401.93,5690 5426.93,5665 5449.05,5665 cw(c5449.05,5650) 5464.05,5650 5464.05,5636.79 ccw(c5479.05,5636.79) 5494.05,5636.79 5494.05,5650 cw(c5509.05,5650) 5524.05,5650 5524.05,5640 ccw(c5539.05,5640) 5554.05,5640 5554.05,5650 cw(c5569.05,5650) 5584.05,5650 5584.05,5638.25 ccw(c5599.05,5638.25) 5614.05,5638.25 5614.05,5650 cw(c5629.05,5650) 5629.05,5665 5629.22,5664.83 5640.04,5664.83 5654.53,5650.33 ccw(c5655.34,5651.14) 5655.34,5650 5676.93,5650 5751.93,5725 5845.72,5725 5845.97,5725.25 ccw(c5856.58,5735.86) 5867.18,5746.46 5822.91,5790.74 cw(c5833.51,5801.35) 5844.12,5811.95 5888.4,5767.68 ccw(c5899,5778.28) 5909.61,5788.89 5865.33,5833.17 cw(c5875.94,5843.77) 5886.55,5854.38 5930.82,5810.1 ccw(c5941.43,5820.71) 5952.04,5831.32 5907.76,5875.59 cw(c5918.37,5886.2) 5928.97,5896.81 5973.25,5852.53 ccw(c5983.86,5863.14) 5994.46,5873.74 5950.19,5918.02 cw(c5960.79,5928.63) 5971.4,5939.23 6015.68,5894.96 ccw(c6026.28,5905.56) 6036.89,5916.17 5992.61,5960.44 cw(c6003.22,5971.05) 6013.83,5981.66 6058.1,5937.38 ccw(c6068.71,5947.99) 6079.32,5958.6 6035.04,6002.87 cw(c6045.65,6013.48) 6035.04,6024.08 6040.95,6030 6246.93,6030 6286.93,5990 6286.93,5855 6251.93,5820 6251.93,5680 6261.93,5670 v1(6286.93,5670)
PG8: U3.38 U6.112 | length 2449.1
  Top Layer w13.8: U6.112@6275.44,5737.24 6275.44,5853.5 6355.71,5933.78 6415.71,5933.78 6456.93,5975 7601.93,5975 v1(7631.93,5945) ; v1(7661.93,5800) 7661.93,5515 7736.93,5440 7736.93,5182.21 v1(7773.63,5145.51) U3.38@7829.06,5145.51
  Bottom Layer w13.8: v1(7631.93,5945) 7661.93,5915 v1(7661.93,5800)
PG9: U5.2 U6.152 | length 2078.9
  Top Layer w10: v1(5661.93,5350) 5716.93,5350 5774.58,5292.36 U6.152@5810.88,5292.36
  Bottom Layer w10: U5.2@5326.93,3705 5286.93,3745 5286.93,4290 5196.93,4380 5196.93,4690 5501.93,4995 5501.93,5110 5621.93,5230 5621.93,5335 5636.93,5350 v1(5661.93,5350)
PG10: U5.3 U6.153 | length 2275.8
  Top Layer w10: U6.153@5810.88,5272.68 5859.61,5272.68 v1(5866.93,5280)
  Bottom Layer w10: U5.3@5426.93,3605 5376.93,3655 5376.93,3740 5306.93,3810 5306.93,4295 5216.93,4385 5216.93,4681.72 5521.93,4986.72 5521.93,5095 5641.93,5215 5641.93,5295 5666.93,5320 5846.93,5320 5866.93,5300 v1(5866.93,5280)
PG11: LCD2.24 U6.154 | length 2812.3
  Top Layer w10: v1(5241.93,5680) 5260.83,5698.9 LCD2.24@5293.11,5698.9 ; v1(5291.93,5120) 5311.93,5100 5461.93,5100 5476.93,5115 5476.93,5235 5494.92,5252.99 5506.93,5252.99 cw(c5506.93,5237.99) 5521.93,5237.99 5521.93,5115 ccw(c5536.93,5115) 5551.93,5115 5551.93,5237.99 cw(c5566.93,5237.99) 5581.93,5237.99 5581.93,5119.81 ccw(c5596.93,5119.81) 5611.93,5119.81 5611.93,5237.99 cw(c5626.93,5237.99) 5641.93,5237.99 5641.93,5122.44 ccw(c5656.93,5122.44) 5671.93,5122.44 5671.93,5237.99 cw(c5686.93,5237.99) 5686.93,5252.99 U6.154@5810.88,5252.99
  Bottom Layer w10: v1(5241.93,5680) 5241.93,5656.17 ccw(c5256.93,5656.17) 5256.93,5641.17 5267.8,5641.17 cw(c5267.8,5626.17) 5267.8,5611.17 5233.93,5611.17 ccw(c5233.93,5603.17) 5225.94,5603.17 5225.94,5589.16 ccw(c5233.93,5589.16) 5233.93,5581.17 5267.8,5581.17 cw(c5267.8,5566.17) 5267.8,5551.17 5218.69,5551.17 ccw(c5218.69,5536.17) 5218.69,5521.17 5267.8,5521.17 cw(c5267.8,5506.17) 5267.8,5491.17 5216.07,5491.17 ccw(c5216.07,5476.17) 5216.07,5461.17 5267.8,5461.17 cw(c5267.8,5446.17) 5267.8,5431.17 5216.07,5431.17 ccw(c5216.07,5416.17) 5216.07,5401.17 5267.8,5401.17 cw(c5267.8,5386.17) 5267.8,5371.17 5216.07,5371.17 ccw(c5216.07,5356.17) 5216.07,5341.17 5267.8,5341.17 cw(c5267.8,5326.17) 5267.8,5311.17 5256.93,5311.17 ccw(c5256.93,5296.17) 5241.93,5296.17 5241.93,5170 v1(5291.93,5120)
PG12: U5.4 U6.155 | length 1915.4
  Top Layer w10: v1(5698.68,5227.38) 5704.61,5233.31 U6.155@5810.88,5233.31
  Bottom Layer w10: U5.4@5426.93,3705 5426.93,3725 5326.93,3825 5326.93,4300 5236.93,4390 5236.93,4673.43 5541.93,4978.43 5541.93,5085 5684.31,5227.38 v1(5698.68,5227.38)
PG13: U5.5 U6.156 | length 2043.8
  Top Layer w10: v1(5721.93,5200) 5735.55,5213.62 U6.156@5810.88,5213.62
  Bottom Layer w10: U5.5@5526.93,3605 5476.93,3655 5476.93,3765 5461.93,3780 5406.93,3780 5346.93,3840 5346.93,4305 5256.93,4395 5256.93,4665.15 5561.93,4970.15 5561.93,5070 5691.93,5200 v1(5721.93,5200)
PG14: U5.7 U6.157 | length 1982.8
  Top Layer w10: v1(5751.93,5180) 5765.87,5193.94 U6.157@5810.88,5193.94
  Bottom Layer w10: U5.7@5626.93,3605 5606.93,3605 5576.93,3635 5576.93,3760 5516.93,3820 5421.93,3820 5391.93,3850 5391.93,4065 5511.93,4185 5511.93,4891.86 5581.93,4961.86 5581.93,5060 5691.93,5170 5741.93,5170 v1(5751.93,5180)
PG15: U3.17 U6.160 | length 1703.8
  Top Layer w13.8: U6.160@5810.88,5134.88 5811,5135 6446.93,5135 6566.93,5255 v1(6651.93,5255) ; v1(7329.37,5145.51) U3.17@7384.8,5145.51
  Bottom Layer w13.8: v1(6651.93,5255) 6681.93,5225 6681.93,5165 6701.93,5145 7328.07,5145 v1@7328.58,5145.51
PH2: U5.32 U6.43 | length 1093.1
  Top Layer w10: U6.43@6708.51,4749.06 6708.51,4543.43 6756.93,4495 6756.93,4245 6776.93,4225 6776.93,3835 6826.93,3785 U5.32@6826.93,3705
PH3: U5.33 U6.44 | length 1226.4
  Top Layer w10: U6.44@6728.2,4749.06 6728.2,4558.74 6776.93,4510 6776.93,4255 6796.93,4235 6796.93,3850 6876.93,3770 6876.93,3655 U5.33@6926.93,3605
PH4: R18.2 U4.6 U6.45 | length 1031.1
  Top Layer w10: U6.45@6799.06,4819.92 6839.92,4819.92 6851.93,4807.9 6851.93,4535 6870.32,4516.62 cw(c6865.32,4511.62) 6870.32,4506.62 ccw(c6875.32,4501.62) 6870.32,4496.62 6881.53,4485.4 ccw(c6886.53,4490.4) 6891.53,4485.4 cw(c6896.53,4480.4) 6901.53,4485.4 6902.32,4485.4 6912.74,4474.98 6912.74,4474.19 cw(c6907.74,4469.19) 6912.74,4464.19 ccw(c6917.74,4459.19) 6912.74,4454.19 6912.74,4453.4 6923.17,4442.98 6923.96,4442.98 ccw(c6928.96,4447.98) 6933.96,4442.98 ; 6934.69,4444.13 cw(c6939.69,4439.13) 6944.69,4444.13 6955.9,4432.92 cw(c6950.9,4427.92) 6955.9,4422.92 ; 6955.17,4421.76 ccw(c6960.17,4416.76) 6955.17,4411.76 6954.91,4411.5 6965.86,4400.55 6966.38,4400.55 ccw(c6971.38,4405.55) 6976.38,4400.55 cw(c6981.38,4395.55) 6986.38,4400.55 7001.93,4385 7031.93,4385 7041.93,4375 U4.6@7041.93,4317.73 7041.93,4265 7056.93,4250 7255.76,4250 R18.2@7301.1,4204.66
PH5: R20.2 U4.5 U6.46 | length 1031.4
  Top Layer w10: U6.46@6799.06,4839.61 6852.33,4839.61 6871.93,4820 6871.93,4550 7016.93,4405 7076.93,4405 7091.93,4390 U4.5@7091.93,4317.73 7119.66,4290 7281.59,4290 R20.2@7366.93,4204.66
PH6: LCD1.34 LCD2.38 U6.83 | length 6099.9
  Top Layer w10: LCD2.38@5293.11,5974.49 5411.42,5974.49 v1(5426.93,5990) ; v1(6236.93,6215) 6251.93,6215 6286.93,6180 6816.93,6180 6901.93,6095 7161.93,6095 7206.93,6050 v1(7261.93,6050) 7656.93,6050 7706.93,6000 8146.93,6000 8276.93,6130 8506.93,6130 8656.93,5980 8656.93,5055 v1(8646.93,5045) ; U6.83@6799.06,5567.95 6914.88,5567.95 v1(6991.93,5645)
  Bottom Layer w10: v1(5426.93,5990) 5441.93,5990 5696.93,6245 6206.93,6245 v1(6236.93,6215) ; v1(6991.93,5645) 7251.93,5905 7251.93,6040 v1(7261.93,6050) ; LCD1.34@8456.16,4435 8461.16,4430 8506.93,4430 8646.93,4570 v1(8646.93,5045)
PH7: LCD1.31 LCD2.39 U6.84 | length 6446.3
  Top Layer w10: LCD2.39@5293.11,5994.17 5346.1,5994.17 v1(5356.93,6005) ; v1(6296.93,6215) 6311.93,6200 6831.93,6200 6916.93,6115 7196.93,6115 v1(7231.93,6080) 7278.52,6080 7288.52,6070 7676.93,6070 7726.93,6020 8136.93,6020 8266.93,6150 8531.93,6150 8681.93,6000 v1(8681.93,4910) ; U6.84@6799.06,5587.64 6894.57,5587.64 v1(6951.93,5645)
  Bottom Layer w10: v1(5356.93,6005) 5381.93,6030 5451.93,6030 5696.93,6275 6236.93,6275 v1(6296.93,6215) ; v1(6951.93,5645) 6951.93,5650 7216.93,5915 7216.93,6065 v1(7231.93,6080) ; LCD1.31@8356.16,4535 8406.93,4484.23 8406.93,4405 8431.93,4380 8571.93,4380 8671.93,4480 8671.93,4900 v1(8681.93,4910)
PH8: H6.3 U6.85 | length 3529.1
  Top Layer w10: U6.85@6799.06,5607.32 6869.25,5607.32 6931.93,5670 v1(6931.93,5755)
  Bottom Layer w10: H6.3@5256.93,6659 5206.93,6709 5206.93,6900 5321.93,7015 6866.93,7015 6966.93,6915 6966.93,5860 6931.93,5825 v1(6931.93,5755)
PH9: H6.4 LCD2.6 U6.86 | length 5599.2
  Top Layer w10: LCD2.6@5293.11,5344.57 5293.54,5345 5511.93,5345 5593.96,5427.03 5593.96,5992.03 v1(5631.93,6030) ; v1(6231.93,6160) 6791.93,6160 v1(6871.93,6080) ; U6.86@6799.06,5627.01 6848.94,5627.01 6901.93,5680 v1(6901.93,5730)
  Bottom Layer w10: H6.4@5256.93,6759 5256.93,6905 5346.93,6995 6851.93,6995 6946.93,6900 6946.93,6095 6901.93,6050 ; v1(5631.93,6030) 5761.93,6160 v1(6231.93,6160) ; v1(6871.93,6080) 6901.93,6050 ; v1(6901.93,5730) 6901.93,6050
PH10: H6.5 LCD2.7 U6.87 | length 5619.6
  Top Layer w10: LCD2.7@5293.11,5364.25 5506.18,5364.25 5561.17,5419.24 5561.17,5434.01 cw(c5569.05,5434.01) 5569.05,5441.89 ccw(c5569.05,5449.77) 5576.93,5449.77 5576.93,5464.01 ccw(c5569.05,5464.01) 5569.05,5471.89 cw(c5569.05,5479.77) 5561.17,5479.77 5560.62,5480.32 5560.62,5493.47 5561.17,5494.01 cw(c5569.05,5494.01) 5569.05,5501.89 ccw(c5569.05,5509.77) 5576.93,5509.77 5576.93,5524.01 ccw(c5569.05,5524.01) 5569.05,5531.89 cw(c5569.05,5539.77) 5561.17,5539.77 5561.17,5554.01 cw(c5569.05,5554.01) 5569.05,5561.89 ccw(c5569.05,5569.77) 5576.93,5569.77 5576.93,5584.01 ccw(c5569.05,5584.01) 5569.05,5591.89 cw(c5569.05,5599.77) 5561.17,5599.77 5561.17,5614.01 cw(c5569.05,5614.01) 5569.05,5621.89 ccw(c5569.05,5629.77) 5576.93,5629.77 5576.93,5644.01 ccw(c5569.05,5644.01) 5569.05,5651.89 cw(c5569.05,5659.77) 5561.17,5659.77 5561.17,5674.01 cw(c5569.05,5674.01) 5569.05,5681.89 ccw(c5569.05,5689.77) 5576.93,5689.77 5576.93,5704.01 ccw(c5569.05,5704.01) 5569.05,5711.89 cw(c5569.05,5719.77) 5561.17,5719.77 5561.17,5734.01 cw(c5569.05,5734.01) 5569.05,5741.89 ccw(c5569.05,5749.77) 5576.93,5749.77 5576.93,5764.01 ccw(c5569.05,5764.01) 5569.05,5771.89 cw(c5569.05,5779.77) 5561.17,5779.77 5561.93,5780.54 v1(5561.93,6000) ; v1(6261.93,6130) 6771.93,6130 v1(6826.93,6075) ; U6.87@6799.06,5646.69 6838.62,5646.69 6866.93,5675 v1(6866.93,5710)
  Bottom Layer w10: H6.5@5356.93,6659 5356.93,6665 5306.93,6715 5306.93,6900 5381.93,6975 6836.93,6975 6926.93,6885 6926.93,6175 v1(6826.93,6075) 6866.93,6035 v1(6866.93,5710) ; v1(5561.93,6000) 5568.93,6007 5658.93,6007 5781.93,6130 v1(6261.93,6130)